# EAGLE board ECA0409_PCB_Schmitt_Trigger (EAGLE 9.6.2)
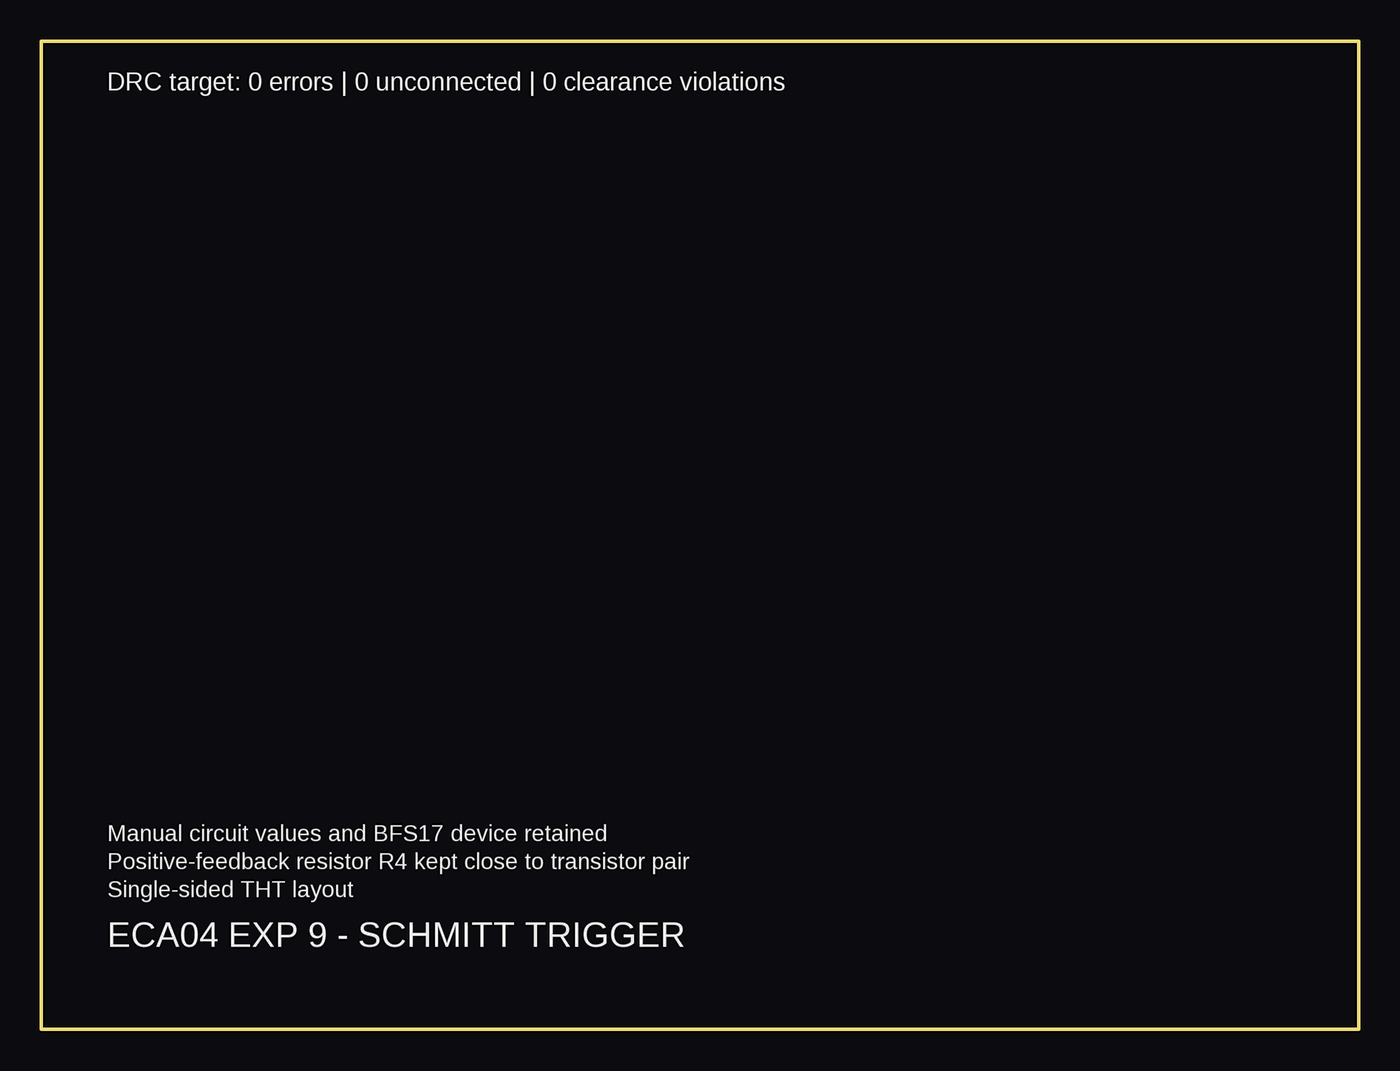
[diagram p0: board, top side]
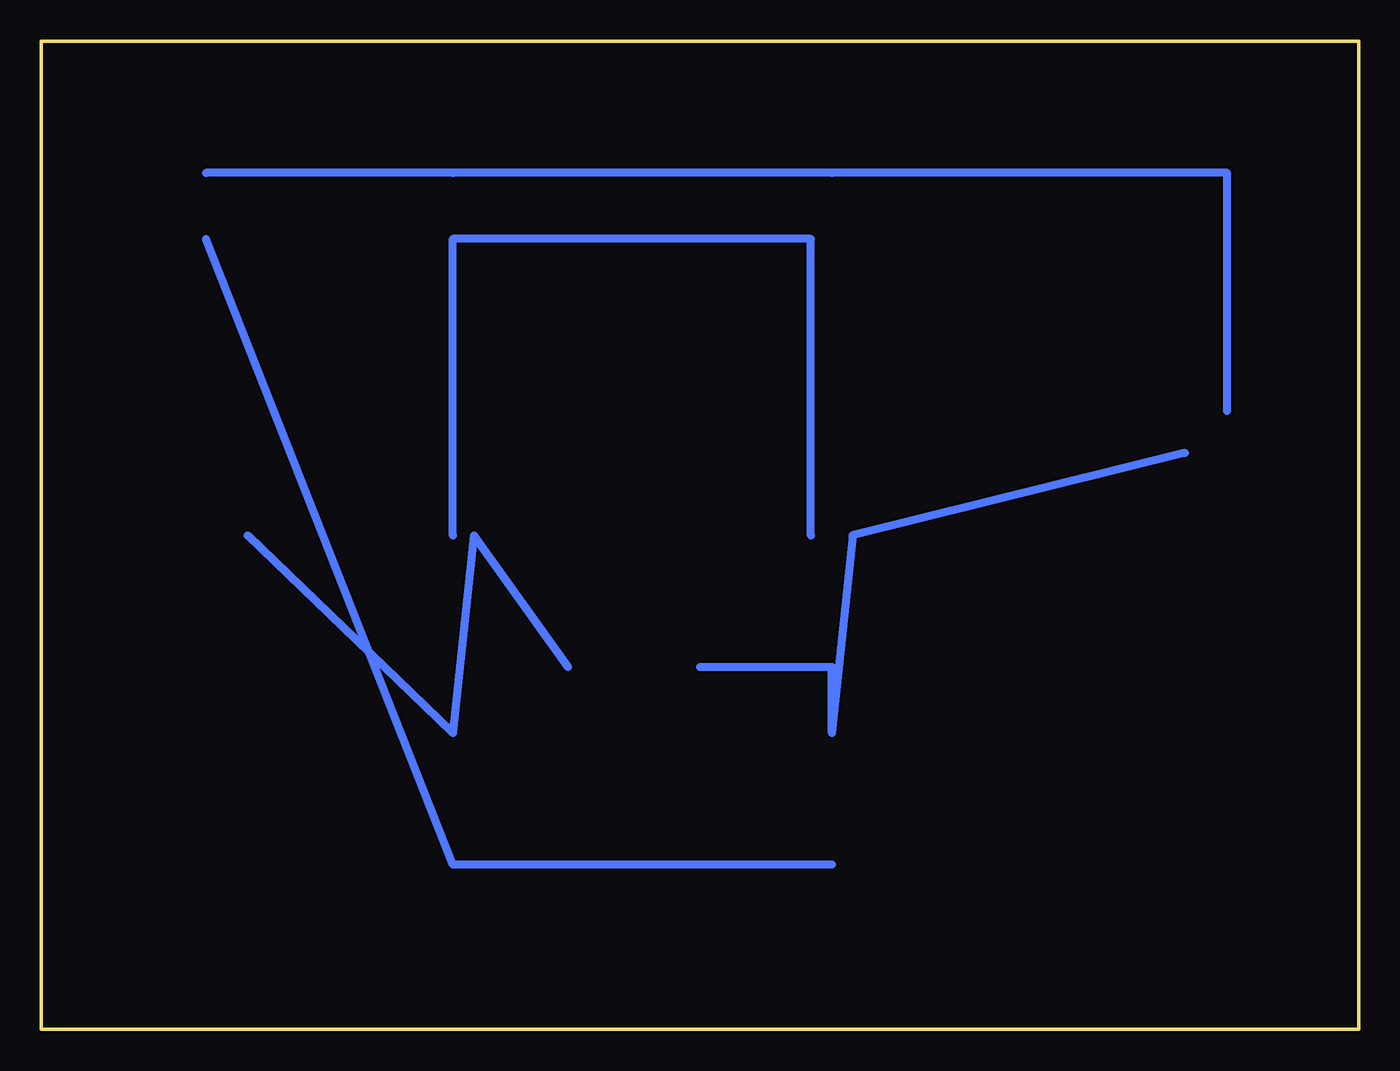
[diagram p1: board, bottom side, seen from below]

Size 80 x 60 mm. Coordinates in mm from the lower left corner, seen from the top.
Outline: 0,0 80,0 80,60 0,60 0,0
Copper layers (1*16): Top / Bottom
Design rules: minimum track width 20mil, minimum drill 36mil, track to track 6mil, track to pad 6mil, pad to pad 6mil, via to via 6mil

## Placement (x,y rotation side)
J1  INPUT  [HDR2]  8,35 0 top
J2  OUTPUT  [HDR2]  70,30 0 top
J3  VCC/GND  [HDR2]  70,50 0 top
Q1  BFS17  [TO92]  32,30 0 top
Q2  BFS17  [TO92]  55,30 0 top
R1  2.3k  [R_THT]  32,14 90 top
R2  1.5k  [R_THT]  32,48 0 top
R3  1k  [R_THT]  55,14 90 top
R4  1.5k  [R_THT]  44,22 0 top
R5  6.8k  [R_THT]  55,48 0 top

## Library data of the parts
J1-J3 Q1 Q2 R1-R5 = Custom

## Nets
EMITTER: Q1.3 Q2.3 R2.1 R5.1
GND: J1.2 J3.2 R2.2 R5.2
IN: J1.1 Q1.2
OUT: J2.1 Q2.1 R3.2
Q1C: Q1.1 R1.2 R4.1
Q2B: Q2.2 R4.2
VCC: J3.1 R1.1 R3.1

## Tracks (layer width: path | path; a pad name or v marks a point on that pad's centre or on a via)
EMITTER
  Bottom 0.5: 33.27,30 33.27,48 55,48 55,30
GND
  Bottom 0.5: 32,52 55,52 | 8,37.54 8,52 70,52
IN
  Bottom 0.5: 10.54,35 30.73,30
OUT
  Bottom 0.5: 53.73,30 55,18 67.46,30
Q1C
  Bottom 0.5: 30.73,30 32,18 32,22 40,22
Q2B
  Bottom 0.5: 48,22 53.73,30
VCC
  Bottom 0.5: 32,10 55,10 | 32,10 | 55,10 | 55,10 70,48

## Text on the board
tPlace: DRC target: 0 errors | 0 unconnected | 0 clearance violations | Manual circuit values and BFS17 device retained | Positive-feedback resistor R4 kept close to transistor pair | Single-sided THT layout | ECA04 EXP 9 - SCHMITT TRIGGER